# Altium PCB YD-RP2040-LITE-base board-pcb.PcbDoc
Units mil, origin at the board's own origin, x right, y up, seen from the top; angles counter-clockwise.
Board outline 900 x 2100 mil, 2 copper layers (Top Layer, Bottom Layer), stack 12.8 mil thick; 4 components, 0 nets, 44 pads, 0 vias.
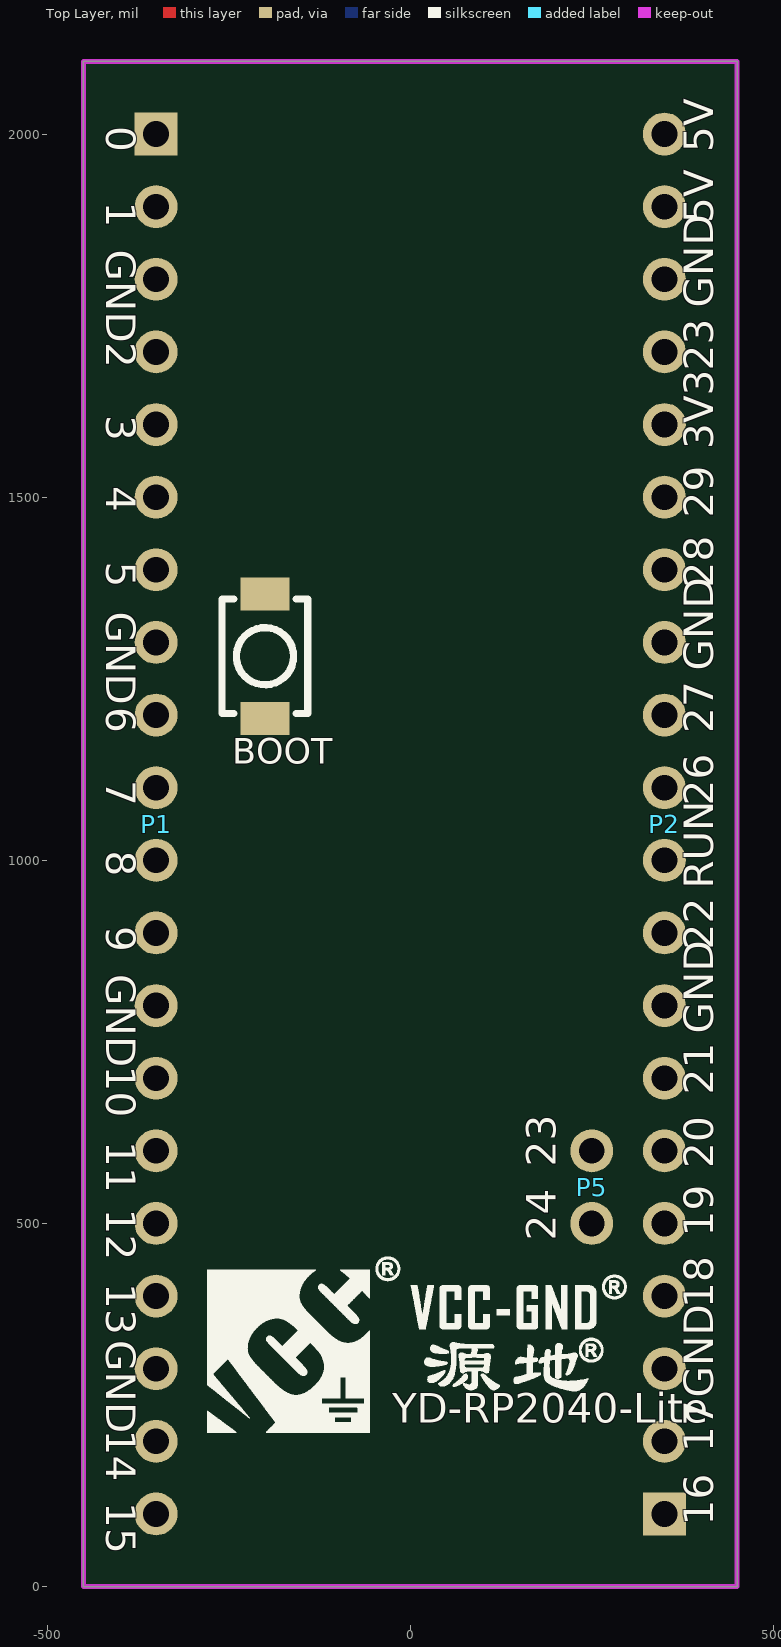
[diagram p0: Top Layer view]
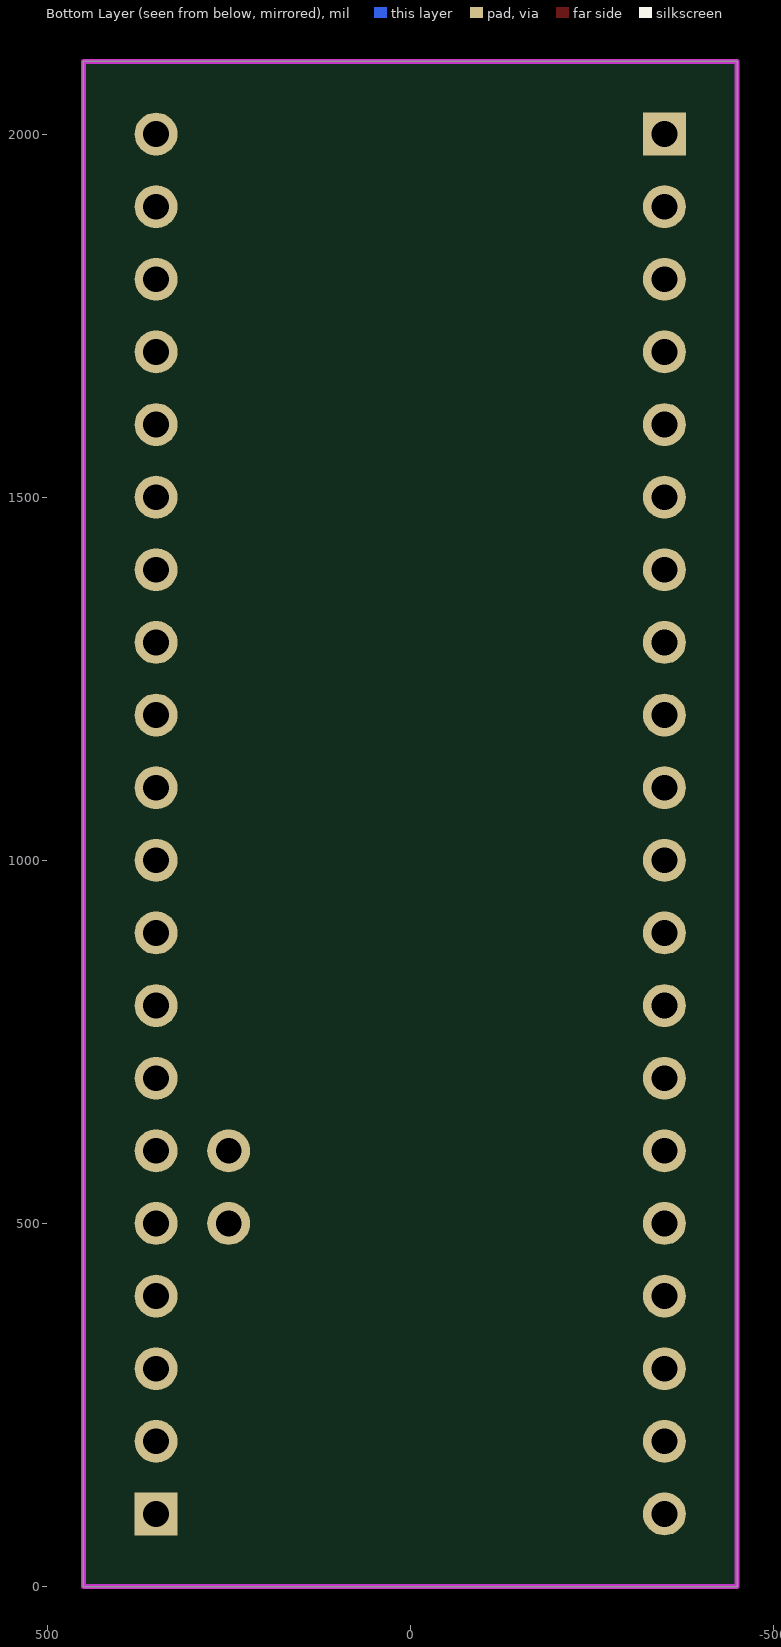
[diagram p1: Bottom Layer view, seen from below]

## Layer stack, top to bottom
Top Solder: solder mask 0.4, Solder Resist, Dk 3.5
Top Layer: signal copper 1.4
Dielectric 1: core 10, FR-4, Dk 4.2
Bottom Layer: signal copper 1.4
Bottom Solder: solder mask 0.4, Solder Resist, Dk 3.5

## Board outline
268,0 -450,0 -450,759 -450,2100 292,2100 450,2100 450,1826 450,0 413,0

## Design rules (kind name [scope] priority, off if disabled: settings)
Clearance [All] p1: gap=5.5 ignorepadtopadclearanceinfootprint=FALSE except(0: Arc-Hole Track-Hole SMDPad-Hole THPad-Hole Via-Hole Fill-Hole Poly-Hole Region-Hole Text-Hole)
HoleToHoleClearance [All] p1: gap=0 allowstackedmicrovias=TRUE
Length "InNet('FMC_A3') Or InNet('FMC_A1')" [InNet('FMC_A3') Or InNet('FMC_A1')] p1: maxlimit=2088.86 minlimit=2000
MinimumSolderMaskSliver [All] p1: minsoldermaskwidth=0
PolygonConnect [(InPadClass('All Pads'))] p1: connectstyle=Relief reliefconductorwidth=20 reliefentries=4 polygonreliefangle="90 Angle" airgapwidth=10
PolygonConnect PolygonConnect_1 [All] p2: connectstyle=Direct reliefconductorwidth=10 reliefentries=4 polygonreliefangle="90 Angle" airgapwidth=10
RoutingVias [All] p1: holewidth=28 width=50 viastyle="Through Hole" minholewidth=28 minwidth=50 maxholewidth=28 maxwidth=50
SilkToSilkClearance [All] p1: silktosilkclearance=0
SilkToSolderMaskClearance [IsPad] p1: minsilkscreentomaskgap=0 clearancetoexposedcopper=TRUE
SolderMaskExpansion [All] p1: expansion=4 istentingtop=FALSE
Width [All] p1: maxlimit=50 minlimit=6 preferedwidth=10
26 further rules are at their usual default settings.

## Components (designator, comment, footprint, x,y, rotation, side; value= is the part's Value field where it differs from the comment)
BOOT "ST-1185S" SW-SMD_ST-1185S -200,1281.02 r90 top
P1 "Header 20" HDR1X20 -350,2000 r270 top
P2 "Header 20" HDR1X20 350,100 r90 top
P5 "Header 2" HDR1X2 250,600 r270 top

## Footprints (in the part's own frame and the unit in brackets; to place one, negate y for a bottom-side part, rotate by r counter-clockwise, add the part's x,y. Pads: shape width x height; smd on the part's side, far side on the other; paste and mask are expansions set on the pad)
HDR1X2 [mm] "Connector; Header; 2 Position"
  round 1.5 hole 0.9: 1(0,0) 2(2.54,0)
HDR1X20 [mm] "Connector; Header; 20 Position"
  rect 1.5x1.5 hole 0.9: 1(0,0)
  round 1.5 hole 0.9: 2(2.54,0) 3(5.08,0) 4(7.62,0) 5(10.16,0) 6(12.7,0) 7(15.24,0) 8(17.78,0) 9(20.32,0) 10(22.86,0) 11(25.4,0) 12(27.94,0) 13(30.48,0) 14(33.02,0) 15(35.56,0) 16(38.1,0) 17(40.64,0) 18(43.18,0) 19(45.72,0) 20(48.26,0)
SW-SMD_ST-1185S [mm]
  rect 1.15x1.7 smd: 1(-2.175,0) 2(2.175,0)
  silkscreen extent -2,-1.5 2,1.5, body extent -2.7,-1.45 2.7,1.45, height 2

## Part data
BOOT: BOM_JLCPCB Part Class="Extended Part", BOM_Manufacturer="RI SHENG", BOM_Manufacturer Part=ST-1185S, BOM_Supplier=LCSC, BOM_Supplier Part=C589191, Contributor=LCSC, spicePre=S, spiceSymbolName=ST-1185S
P1 P2: "Header, 20-Pin", LatestRevisionDate=17-Jul-2002, LatestRevisionNote="Re-released for DXP Platform.", Publisher="Altium Limited"
P5: "Header, 2-Pin", LatestRevisionDate=17-Jul-2002, LatestRevisionNote="Re-released for DXP Platform.", Publisher="Altium Limited"

## Nets (pads, with @x,y where several pads share a name; then routed paths per layer and width w, separated by ;. In a path a pad name is that pad's centre, name@x,y a point inside that pad or via, vN(x,y) a via of type N, cw(c..) or ccw(c..) an arc to the next point about the centre after c; other vN are vias at no path point)
pads on no net: BOOT.1 BOOT.2 P1.1 P1.2 P1.3 P1.4 P1.5 P1.6 P1.7 P1.8 P1.9 P1.10 P1.11 P1.12 P1.13 P1.14 P1.15 P1.16 P1.17 P1.18 P1.19 P1.20 P2.1 P2.2 P2.3 P2.4 P2.5 P2.6 P2.7 P2.8 P2.9 P2.10 P2.11 P2.12 P2.13 P2.14 P2.15 P2.16 P2.17 P2.18 P2.19 P2.20 P5.1 P5.2

## Keep-outs
Keep-Out Layer:
  lines w7: -450,1 -450,2099 ; -450,0 450,0 450,2100 -450,2100 -450,0

## Silkscreen, mask and mechanical layers (free items; w line width, h text height)
Top Overlay:
  drawing of 6540 lines, arcs and shapes, not listed
  text "0" at -432,2011 h70 r270
  text "5V" at 431,1975 h70 r90
  text "1" at -432,1907 h70 r270
  text "5V" at 431.06,1877 h70 r90
  text "GND" at -432,1841 h70 r270
  text "GND" at 431.1,1761 h70 r90
  text "2" at -432,1713 h70 r270
  text "23" at 431.1,1674 h70 r90
  text "3" at -432,1613 h70 r270
  text "3V3" at 431.06,1566 h70 r90
  text "4" at -432,1515 h70 r270
  text "29" at 431.1,1472 h70 r90
  text "5" at -432,1411 h70 r270
  text "28" at 431.1,1375 h70 r90
  text "GND" at -432,1342 h70 r270
  text "GND" at 431.1,1261 h70 r90
  text "6" at -432,1211 h70 r270
  text "27" at 431.1,1175 h70 r90
  text "7" at -432,1110 h70 r270
  text "26" at 431.1,1075 h70 r90
  text "8" at -432,1013 h70 r270
  text "RUN" at 431.1,961 h70 r90
  text "9" at -432,909 h70 r270
  text "22" at 431.1,877 h70 r90
  text "GND" at -432,843 h70 r270
  text "GND" at 431.1,761 h70 r90
  text "10" at -432,717 h70 r270
  text "21" at 431.1,677 h70 r90
  text "11" at -432,613 h70 r270
  text "23" at 214.1,578 h70 r90
  text "20" at 431.1,576 h70 r90
  text "12" at -432,520 h70 r270
  text "19" at 431.1,482 h70 r90
  text "24" at 214.1,476 h70 r90
  text "13" at -432,418 h70 r270
  text "18" at 431.1,383 h70 r90
  text "GND" at -432,339 h70 r270
  text "GND" at 431.1,260 h70 r90
  text "14" at -432,216 h70 r270
  text "YD-RP2040-Lite" at -25,212 h70
  text "17" at 431.1,185 h70 r90
  text "15" at -432,116 h70 r270
  text "16" at 431.1,84 h70 r90